# Altium PCB PCB_TUD-EHC-CrankModule_1.pcbdoc
Units mm, origin at the board's own origin, x right, y up, seen from the top; angles counter-clockwise.
Board outline 74.31 x 35.93 mm, 2 copper layers (Top Layer, Bottom Layer); 37 components, 28 nets, 122 pads, 39 vias.
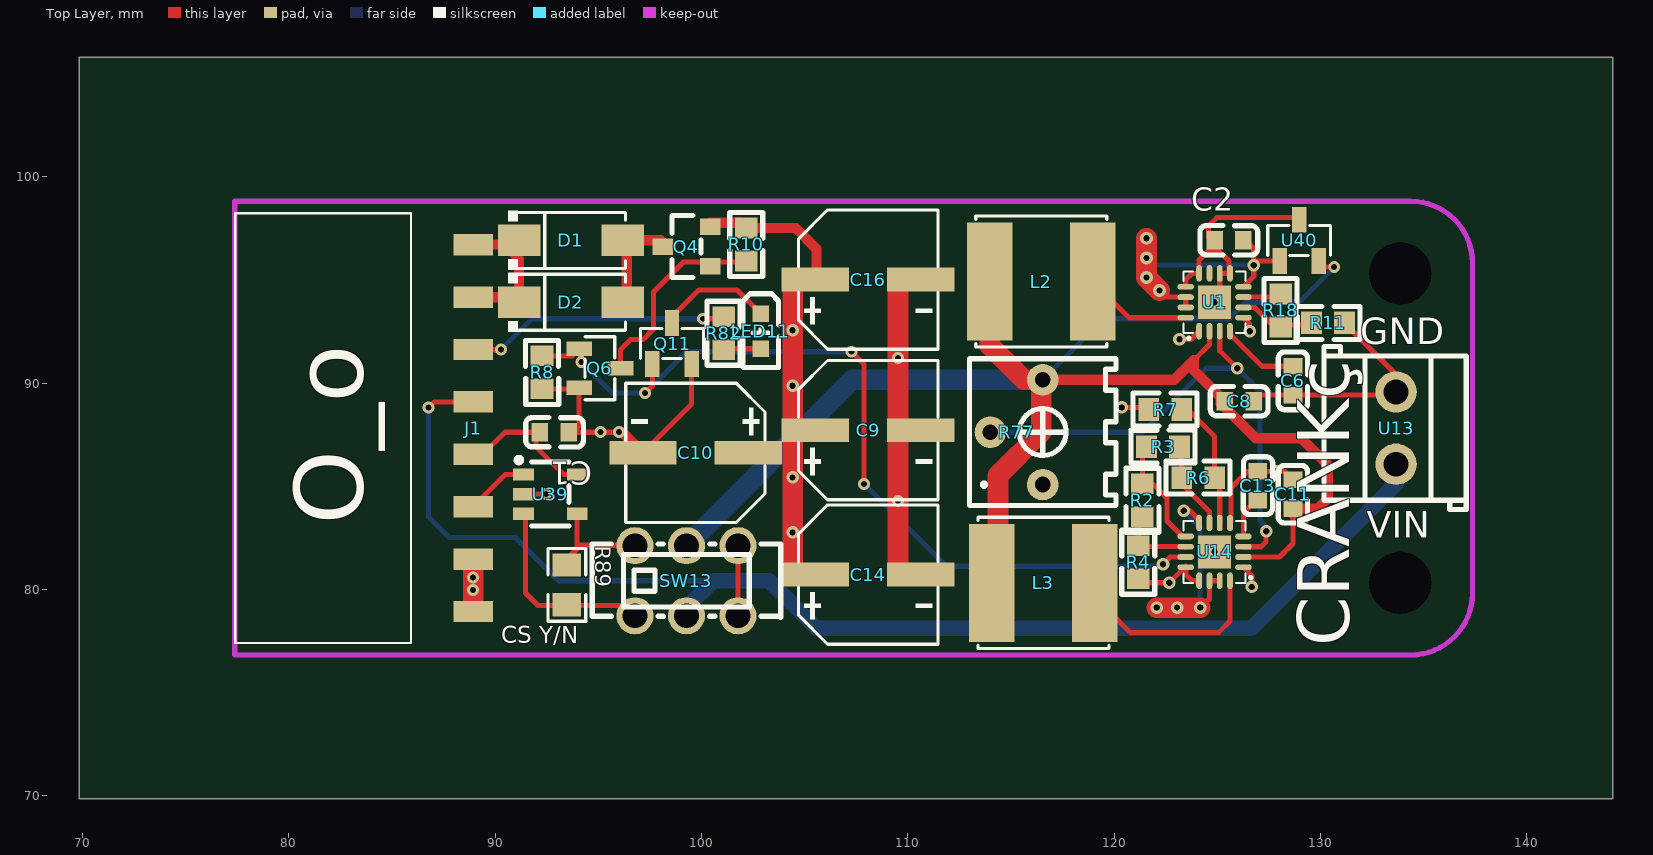
[diagram p0: Top Layer view]
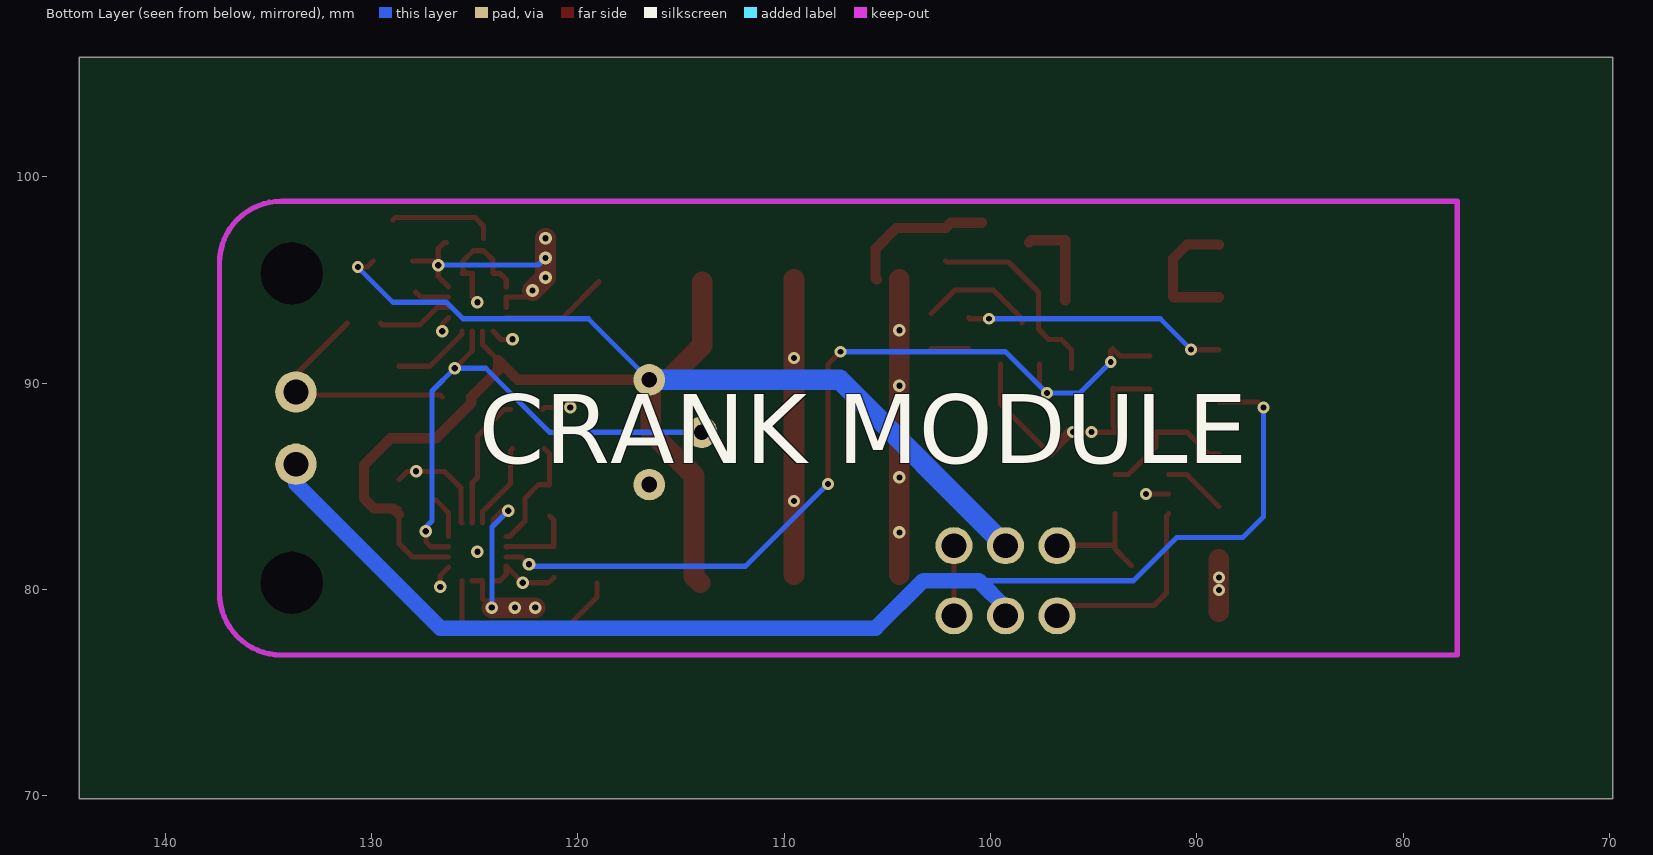
[diagram p1: Bottom Layer view, seen from below]

## Layer stack, top to bottom
Top Layer: signal copper (thickness not stored)
Dielectric: dielectric 0.32, FR-4, Dk 4.8
Bottom Layer: signal copper (thickness not stored)

## Board outline
144.162,69.85 69.85,69.85 69.85,105.78 144.162,105.78
cut-out: 135.373,95.315 ccw(c133.873,95.315) 132.373,95.315 ccw(c133.873,95.315)
cut-out: 135.373,80.315 ccw(c133.873,80.315) 132.373,80.315 ccw(c133.873,80.315)

## Components (designator, comment, footprint, x,y, rotation, side; value= is the part's Value field where it differs from the comment)
C1 "100nF" C0603 92.873,87.615 r180 top
C2 "100nF" C0603 125.573,96.915 r0 top
C6 "10nF" C0603 128.673,90.115 r90 top
C8 "4.7uF" C0603 126.073,89.115 r0 top
C9 "220uF" CAP-SMD_BD6.3-L6.6-W6.6-LS7.2-R-RD 108.073,87.715 r180 top
C10 "220uF" CAP-SMD_BD6.3-L6.6-W6.6-LS7.2-R-RD 99.718,86.615 r0 top
C11 "4.7uF" C0603 128.673,84.615 r90 top
C13 "10nF" C0603 126.973,85.015 r270 top
C14 "220uF" CAP-SMD_BD6.3-L6.6-W6.6-LS7.2-R-RD 108.073,80.715 r180 top
C16 "220uF" CAP-SMD_BD6.3-L6.6-W6.6-LS7.2-R-RD 108.073,95.015 r180 top
D1 "SS54" SMA_L4.4-W2.8-LS5.4-R-RD 93.673,96.915 r0 top
D2 "SS54" SMA_L4.4-W2.8-LS5.4-R-RD 93.673,93.915 r0 top
J1 "SMH-108-02-G-S-TR" SMH-108-02-XX-S-TR 88.93,87.815 r270 top
L2 "22uH" IND-SMD_L6.0-W6.0 116.473,94.915 r0 top
L3 "22uH" IND-SMD_L6.0-W6.0 116.573,80.315 r0 top
LED11 "KT-0603R" LED0603-R-RD 102.873,92.515 r270 top
Q4 "AO3401A" SOT-23_L2.9-W1.3-P1.90-LS2.4-BR 99.273,96.615 r0 top
Q6 "SI2302" SOT-23-3_L2.9-W1.3-P1.90-LS2.4-BR 95.073,90.715 r180 top
Q11 "AO3400A" SOT-23-3_L2.9-W1.3-P1.90-LS2.4-BR 98.573,91.915 r270 top
R2 "2.2MΩ" R0603 121.373,84.315 r270 top
R3 "3MΩ" R0603 122.373,86.915 r0 top
R4 "2.2MΩ" R0603 121.173,81.315 r270 top
R6 "5.1MΩ" R0603 124.073,85.415 r0 top
R7 "3MΩ" R0603 122.473,88.715 r0 top
R8 "3MΩ" R0603 92.273,90.515 r270 top
R10 "3MΩ" R0603 102.173,96.715 r90 top
R11 "3MΩ" R0603 130.373,92.915 r180 top
R18 "5.1MΩ" R0603 128.073,93.515 r270 top
R77 "3362P-1-103" RES-ADJ-TH_3362P 115.273,87.615 r90 top
R82 "1kΩ" R0603 101.073,92.415 r90 top
R89 "RL0805FR-070R02L" R0805 93.473,80.215 r270 top
SW13 "K3-2235D-F1" SW-TH_K3-2235D-F1 99.273,80.415 r0 top
U1 "BQ25504RGTT" VQFN-16_L3.0-W3.0-P0.50-TL-EP 124.873,93.915 r90 top
U13 "KF350-3.5-2P" CONN-TH_P3.50_KF350-3.5-2P 133.673,87.815 r90 top
U14 "BQ25504RGTT" VQFN-16_L3.0-W3.0-P0.50-TL-EP 124.873,81.815 r180 top
U39 "INA180A3IDBVR" SOT-23-5_L3.0-W1.7-P0.95-LS2.8-BR 92.673,84.615 r180 top
U40 "REF3318AIDBZT" SOT-23-3_L2.9-W1.3-P1.90-LS2.4-BR 128.973,96.915 r270 top

## Footprints (in the part's own frame and the unit in brackets; to place one, negate y for a bottom-side part, rotate by r counter-clockwise, add the part's x,y. Pads: shape width x height; smd on the part's side, far side on the other; paste and mask are expansions set on the pad)
C0603 [mm]
  rect 0.8x0.9 smd paste+0 mask+0.051: 1(-0.7,0) 2(0.7,0)
  silkscreen extent -1.41,-0.71 1.39,0.72
CAP-SMD_BD6.3-L6.6-W6.6-LS7.2-R-RD [mm]
  rect 3.26x1.15 smd paste+0 mask+0.051: 1(2.555,0) 2(-2.555,0)
  silkscreen extent -3.39,-3.38 3.36,3.38
CONN-TH_P3.50_KF350-3.5-2P [mm]
  round 2 hole 1.2 paste+0 mask+0.051: 1(-1.75,0) 2(1.75,0)
  silkscreen extent -3.95,-3.4 3.95,3.5
IND-SMD_L6.0-W6.0 [mm]
  rect 2.2x5.72 smd paste+0 mask+0.051: 1(-2.5,0) 2(2.5,0)
  silkscreen extent -3.18,-3.18 3.18,3.18
LED0603-R-RD [mm]
  rect 0.8x0.8 smd paste+0 mask+0.051: 1(0.851,0) 2(-0.851,0)
  silkscreen extent -1.82,-0.86 1.77,0.86
R0603 [mm]
  rect 1x1.1 smd paste+0 mask+0.051: 1(-0.8,0) 2(0.8,0)
  silkscreen extent -1.55,-0.8 1.55,0.81
R0805 [mm]
  rect 1.133x1.377 smd paste-100 mask+0.051: 1(-0.966,0) 2(0.966,0)
  silkscreen extent -1.76,-0.92 1.76,0.92
RES-ADJ-TH_3362P [mil]
  round 60 hole 30 paste+0 mask+2: 1(-99.99,-49.99) 2(0.01,50.01) 3(100.01,-49.99)
  silkscreen extent -140,-190 140,90
SMA_L4.4-W2.8-LS5.4-R-RD [mm]
  rect 2.063x1.539 smd paste+0 mask+0.051: 1(2.504,0) 2(-2.504,0)
  silkscreen extent -3.03,-1.43 2.65,1.43
SMH-108-02-XX-S-TR [mm]
  rect 1.04x1.91 smd paste+0 mask+0.051: 1(-8.89,0) 2(-6.35,0) 3(-3.81,0) 4(-1.27,0) 5(1.27,0) 6(3.81,0) 7(6.35,0) 8(8.89,0)
  silkscreen extent -10.42,-11.53 10.42,-3.02
SOT-23-3_L2.9-W1.3-P1.90-LS2.4-BR [mm]
  rect 1.25x0.7 smd paste+0 mask+0.051: 1(1,-0.95) 2(1,0.95) 3(-1,0)
  silkscreen extent -0.73,-1.53 0.73,1.53
SOT-23-5_L3.0-W1.7-P0.95-LS2.8-BR [mm]
  rect 1x0.6 smd paste+0 mask+0.051: 1(1.3,-0.95) 2(1.3,0) 3(1.3,0.95) 4(-1.3,0.95) 5(-1.3,-0.95)
  silkscreen extent -0.9,-1.78 1.65,1.55
SOT-23_L2.9-W1.3-P1.90-LS2.4-BR [mm]
  rect 1x0.8 smd paste+0 mask+0.051: 1(1.15,-0.95) 2(1.15,0.95) 3(-1.15,0)
  silkscreen extent -0.7,-1.5 0.7,1.5
SW-TH_K3-2235D-F1 [mm]
  round 1.8 hole 1.2 paste+0 mask+0.051: 1(-2.5,1.7) 2(0,1.7) 3(2.5,1.7) 4(-2.5,-1.7) 5(0,-1.7) 6(2.5,-1.7)
  silkscreen extent -4.57,-1.78 4.57,1.78
VQFN-16_L3.0-W3.0-P0.50-TL-EP [mm]
  oval 0.8x0.28 smd paste-100 mask+0.051: 1(-1.399,0.749) 2(-1.399,0.249) 3(-1.399,-0.249) 4(-1.399,-0.749) 9(1.4,-0.749) 10(1.4,-0.249) 11(1.4,0.249) 12(1.4,0.749)
  oval 0.28x0.8 smd paste-100 mask+0.051: 5(-0.749,-1.4) 6(-0.249,-1.4) 7(0.249,-1.4) 8(0.749,-1.4) 13(0.749,1.399) 14(0.249,1.399) 15(-0.249,1.399) 16(-0.749,1.399)
  rect 1.6x1.6 smd paste-100 mask+0.051: 17(0,0)
  silkscreen extent -1.76,-1.5 1.5,1.5

## Via types
v1: diameter 0.61, hole 0.305, Top Layer to Bottom Layer, 24 vias
v2: diameter 0.58, hole 0.29, Top Layer to Bottom Layer, 15 vias

## Nets (pads, with @x,y where several pads share a name; then routed paths per layer and width w, separated by ;. In a path a pad name is that pad's centre, name@x,y a point inside that pad or via, vN(x,y) a via of type N, cw(c..) or ccw(c..) an arc to the next point about the centre after c; other vN are vias at no path point)
#CRANK_STOR_RDY: Q4.1 Q6.3 R10.1 | length 9.8
  Top Layer w0.248: Q6.3 96.073,91.615 96.573,92.115 97.173,92.115 97.673,92.615 97.673,94.415 99.123,95.865 102.123,95.865 R10.1
$1N107: R6.2 R7.2 U14.6 | length 6.4
  Top Layer w0.248: R7.2 123.573,88.715 124.873,87.415 R6.2 125.122,85.166 U14.6
$1N134: C13.2 U14.4 | length 2.1
  Top Layer w0.25: U14.4 126.273,83.715 126.873,84.315 C13.2
$1N152: L3.2 U14.16 | length 10.1
  Top Layer w0.248: L3.2 119.073,79.615 120.773,77.915 125.073,77.915 125.622,78.464 U14.16
$1N320: R11.2 R18.2 U1.6 | length 3.7
  Top Layer w0.248: U1.6 126.822,93.666 127.673,92.815 127.873,92.815 129.473,92.815 R11.2
$1N352: C6.2 U1.4 | length 3.8
  Top Layer w0.25: U1.4 125.622,92.365 127.173,90.815 C6.2
$1N370: L2.2 U1.16 | length 5.2
  Top Layer w0.248: L2.2 120.722,93.166 U1.16
$1N435: R18.1 U1.7 | length 1.7
  Top Layer w0.248: U1.7 127.622,94.164 R18.1@127.873,94.415
$1N436: R3.2 R6.1 U14.7 | length 4.2
  Top Layer w0.248: R3.2@123.173,86.815 123.273,86.715 123.273,85.115 124.624,83.764 U14.7
$1N476: R2.1 R3.1 U14.9 | length 5.6
  Top Layer w0.25: R2.1@121.373,85.068 121.373,86.568 R3.1@121.62,86.815 ; R2.1@121.373,85.068 121.919,85.068 122.572,84.416 122.572,83.316 123.324,82.564 U14.9
$1N483: R2.2 R4.1 U14.10 | length 3.9
  Top Layer w0.25: R2.2@121.373,83.562 121.173,83.362 121.173,82.068 123.469,82.068 U14.10
$1N8877: LED11.2 Q11.3 | length 5.7
  Top Layer w0.248: Q11.3@98.473,92.915 98.473,93.115 99.873,94.515 101.724,94.515 LED11.2
$1N8878: LED11.1 R82.1 | length 1.8
  Top Layer w0.248: R82.1@101.073,91.662 102.871,91.662 LED11.1
$1N9387: D1.1 D2.1 Q4.3 | length 4.7
  Top Layer w0.5: D2.1@96.377,94.015 96.377,96.915 98.023,96.915 Q4.3@98.123,96.815
$1N13552: R89.1 SW13.1 U39.4 | length 5.7
  Top Layer w0.248: R89.1@93.173,81.147 93.973,81.947 93.973,82.136 ; U39.4 93.973,82.136 ; SW13.1@96.773,82.015 96.652,82.136 93.973,82.136
$1N13553: R89.2 SW13.4 U39.3 | length 9.7
  Top Layer w0.248: U39.3 91.473,83.565 91.473,79.815 92.073,79.215 96.173,79.215 SW13.4@96.773,78.615
$1N13554: SW13.3 SW13.6 | length 3.4
  Top Layer w0.248: SW13.6 SW13.3
$1N20596: J1.4 SW13.5 U13.1 | length 62.8
  Top Layer w0.248: v2(86.773,88.815) 87.043,89.085 J1.4
  Bottom Layer w0.248: v2(86.773,88.815) 86.773,83.515 87.773,82.515 90.973,82.515 93.073,80.415 100.573,80.415
  Bottom Layer w0.75: SW13.5 99.273,79.115 100.573,80.415 103.273,80.415 105.573,78.115 126.673,78.115 133.673,85.115 U13.1
CRANK_STOR: C2.2 C9.1 C10.1 C14.1 C16.1 Q4.2 R10.2 U1.8 U1.14 U1.15 U14.8 U14.14 U14.15 U40.1 | length 48.1
  Top Layer w0.248: C2.2@126.373,96.815 126.473,96.815 126.773,96.515 v1(126.773,95.715) 126.973,95.915 U40.1
  Top Layer w0.25: v1(122.202,94.486) 122.524,94.164 U1.14 ; v1(123.373,83.815) 123.673,83.815 124.124,83.364 U14.8 ; U1.15 U1.14 ; v1(124.173,79.115) 124.573,79.515 124.624,79.515 U14.14 U14.15 ; U1.8 126.773,95.165 v1(126.773,95.715)
  Top Layer w0.5: Q4.2@100.423,97.765 101.923,97.765 R10.2 104.573,97.515 105.573,96.515 105.573,95.07 C16.1
  Top Layer w1: C14.1@104.418,80.715 v1(104.418,82.756) v1(104.418,85.423) v1(104.418,89.868) v1(104.418,92.56) C16.1@104.418,95.015 ; v1(121.574,97.014) v1(121.574,96.06) v1(121.574,95.114) v1(122.202,94.486) ; v1(122.073,79.115) v1(123.053,79.115) v1(124.173,79.115)
  V+ w0.25: 106.174,78.614 106.174,78.815
  V+ w1: v1(122.073,79.115) v1@124.273,79.115
  Bottom Layer w0.25: v1(121.574,96.06) 121.919,95.715 v1(126.773,95.715) ; v1(123.373,83.815) 124.173,83.015 v1(124.173,79.115)
CRANK_STOR_RDY: Q6.1 Q11.1 R8.1 U14.11 | length 42.8
  Top Layer w0.248: R8.1 93.723,91.315 Q6.1 94.173,91.565 v2(94.173,91.015) ; v2(97.273,89.515) 97.623,89.865 Q11.1 ; v2(107.273,91.515) 107.873,90.915 v2(107.873,85.115)
  Top Layer w0.25: v1(122.373,81.215) 122.724,81.566 U14.11
  Bottom Layer w0.248: v2(94.173,91.015) 95.673,89.515 v2(97.273,89.515) 99.273,91.515 v2(107.273,91.515) ; v2(107.873,85.115) 111.873,81.115 122.273,81.115 v1(122.373,81.215)
CURR_SENSE: J1.6 U39.1 | length 3.1
  Top Layer w0.248: J1.6 90.49,85.565 U39.1
DEBUG_5V: J1.3 R82.2 | length 12.8
  Top Layer w0.248: J1.3 88.94,91.615 v2(90.273,91.615) ; v2(100.073,93.115) 101.02,93.115 R82.2@101.073,93.168
  Bottom Layer w0.248: v2(90.273,91.615) 91.773,93.115 v2(100.073,93.115)
GND: C1.1 C2.1 C6.1 C8.2 C9.2 C10.2 C11.2 C13.1 C14.2 C16.2 J1.7 J1.8 Q6.2 Q11.2 R4.2 R7.1 R8.2 R11.1 R77.1 U1.1 U1.5 U1.9 U1.10 U1.12 U1.13 U1.17 U13.2 U14.1 U14.5 U14.12 U14.13 U14.17 U39.2 U40.3 | length 67.9
  Top Layer w0.248: U39.2 v2(92.473,84.615) ; R8.2 94.023,89.715 Q6.2 94.073,87.915 93.773,87.615 v2(95.097,87.615) v2@96.163,87.615 ; C10.2 99.523,88.975 Q11.2 ; C2.1@124.573,97.015 124.573,97.615 124.973,98.015 128.873,98.015 U40.3 ; v1(124.873,93.915) 125.122,94.164 U1.10 ; R11.1 133.673,90.415 U13.2
  Top Layer w0.25: v1(120.373,88.815) 121.62,88.815 R7.1@121.72,88.715 ; R4.2@121.173,80.561 121.42,80.315 v1(122.673,80.315) ; v1@122.674,80.316 123.474,81.116 U14.12 123.474,80.715 123.771,80.415 U14.13 ; v1(123.173,92.115) 123.723,92.115 U1.1 ; U1.13@123.474,94.665 123.474,95.015 123.774,95.315 124.124,95.315 124.124,95.965 124.573,96.414 ; 124.573,96.415 125.071,96.415 125.572,95.914 U1.9@125.572,95.319 ; U1.10@125.122,95.315 125.572,95.315 U1.9@125.572,95.319 ; 125.374,95.335 U1.9@125.572,95.319 ; U14.5 125.674,83.265 125.674,84.916 126.474,85.716 126.974,85.716 127.847,85.716 128.272,85.716 C11.2@128.673,85.315 ; U1.9@125.623,95.315 U1.9@125.572,95.319 ; U14.1 126.673,80.665 v1(126.673,80.115) ; U1.5 126.573,92.865 v1(126.573,92.515) ; C8.2@126.573,89.315 126.673,89.415 C6.1 ; C6.1@128.673,89.414 133.672,89.414 U13.2
  Top Layer w0.5: v2@96.163,87.615 C10.2
  Top Layer w1: J1.8 v2(88.93,79.96) v2(88.93,80.576) J1.7 ; C14.2@109.528,80.715 v2(109.528,84.278) v2(109.528,91.212) C16.2@109.528,95.015
  other v1: 124.873,81.815 127.847,85.716
  other v2: 96.007,87.615
MAIN_STOR: D1.2 D2.2 J1.1 J1.2 | length 6.6
  Top Layer w0.5: J1.2@88.93,94.164 91.122,94.164 91.155,94.197 91.155,96.034 90.472,96.714 J1.1@88.93,96.704
PWR_IN: C8.1 C11.1 L2.1 L3.1 R77.3 SW13.2 U1.2 U14.2 U40.2 | length 81.6
  Top Layer w0.248: 123.862,91.104 124.624,91.866 U1.2 ; U14.2 128.024,81.566 128.673,82.215 128.673,83.64 C11.1 ; U40.2 130.223,95.615 v2(130.673,95.615)
  Top Layer w0.5: R77.3 122.913,90.155 123.862,91.104 123.862,90.626 125.173,89.315 125.173,89.015 126.873,87.315 129.073,87.315 130.373,86.015 130.373,84.415 129.873,83.915 128.948,83.915 C11.1@128.673,83.64
  Top Layer w1: L2.1 113.973,91.815 115.633,90.155 R77.3 116.473,90.085 116.473,87.615 114.373,85.515 114.373,80.615 L3.1
  Bottom Layer w0.248: R77.3 119.503,93.115 125.573,93.115 126.373,93.915 128.973,93.915 v2(130.673,95.615)
  Bottom Layer w1: SW13.2 107.313,90.155 R77.3
PWR_IN_MPPT: R77.2 U1.3 U14.3 | length 25.6
  Top Layer w0.25: U1.3 125.122,91.566 v1(125.973,90.715) ; U14.3 127.122,82.064 127.373,82.315 v1(127.373,82.815)
  Bottom Layer w0.25: R77.2 121.373,87.616 124.472,90.715 v1(125.973,90.715) 127.073,89.615 127.073,83.316 127.373,83.016 v1(127.373,82.815)
V_SENSING: C1.2 J1.5 U39.5 | length 6.7
  Top Layer w0.248: J1.5 89.403,86.545 90.473,87.615 91.973,87.615 91.973,86.915 93.323,85.565 U39.5
"": U1.11

## Polygon pours and split planes (outlines as drawn)
GND on GND (split plane): 137.222,79.815 cw(c135.792,78.397) 134.376,76.965 ccw(c134.374,76.95) 134.373,76.966 80.474,76.966 77.524,76.966 77.524,98.664 134.371,98.664 134.373,98.664 cw(c135.798,97.24) 137.222,95.815 137.222,79.819 ccw(c137.236,79.817)
GND on GND (split plane): 133.17,88.306 133.17,89.565 134.175,89.565 134.175,88.306
GND on GND (split plane): 134.175,90.824 134.175,89.565 133.17,89.565 133.17,90.824
GND on GND (split plane): 132.414,90.067 133.673,90.067 133.673,89.062 132.414,89.062
GND on GND (split plane): 133.673,90.067 134.932,90.067 134.932,89.062 133.673,89.062
GND on GND (split plane): 116.926,85.075 116.926,84.054 116.159,84.054 116.159,85.075
GND on GND (split plane): 116.159,85.075 116.159,86.096 116.926,86.096 116.926,85.075
GND on GND (split plane): 115.522,85.458 116.543,85.458 116.543,84.691 115.522,84.691
GND on GND (split plane): 116.543,85.458 117.564,85.458 117.564,84.691 116.543,84.691
CRANK_STOR on V+ (solid, remove dead copper, pour order 0): 96.773,98.515 123.073,98.515 123.173,98.415 123.173,77.115 123.073,77.215 96.673,77.215

## Keep-outs
Board Outline Layer:
  lines w0.254 net "": 77.373,76.816 80.474,76.815 134.373,76.815 ; 77.373,76.815 77.373,98.815 134.371,98.815 ; 134.373,98.815 cw(c134.373,95.815) 137.373,95.815 137.373,79.815 ; 134.373,76.815 ccw(c134.373,79.815) 137.373,79.815 ; 134.373,76.815 ccw(c134.373,79.815) 137.373,79.815

## Silkscreen, mask and mechanical layers (free items; w line width, h text height)
Top Silkscreen Layer:
  text "GND" at 131.938,91.888 h1.29
  text "O_o" at 83.584,83.125 h3.35 r90
  text "VIN" at 132.238,82.488 h1.29
  text "CS Y/N" at 90.297,77.392 h0.81
  text "CRANKç" at 131.411,77.237 h2.51 r90
Bottom Silkscreen Layer:
  text "CRANK MODULE" at 124.805,86.104 h3.35
Mechanical Layer:
  circle w0.025 net "": c133.873,95.315 r1.5
  circle w0.025 net "": c133.873,80.315 r1.5